# Altium PCB arduino_PCB.PcbDoc (part 1 of 2)
Units mm, origin at the board's own origin, x right, y up, seen from the top; angles counter-clockwise.
Board outline 68.58 x 53.34 mm, 2 copper layers (Top Layer, Bottom Layer); 106 components, 71 nets, 323 pads, 0 vias.
Unrouted connection lines stored in the file: 236.
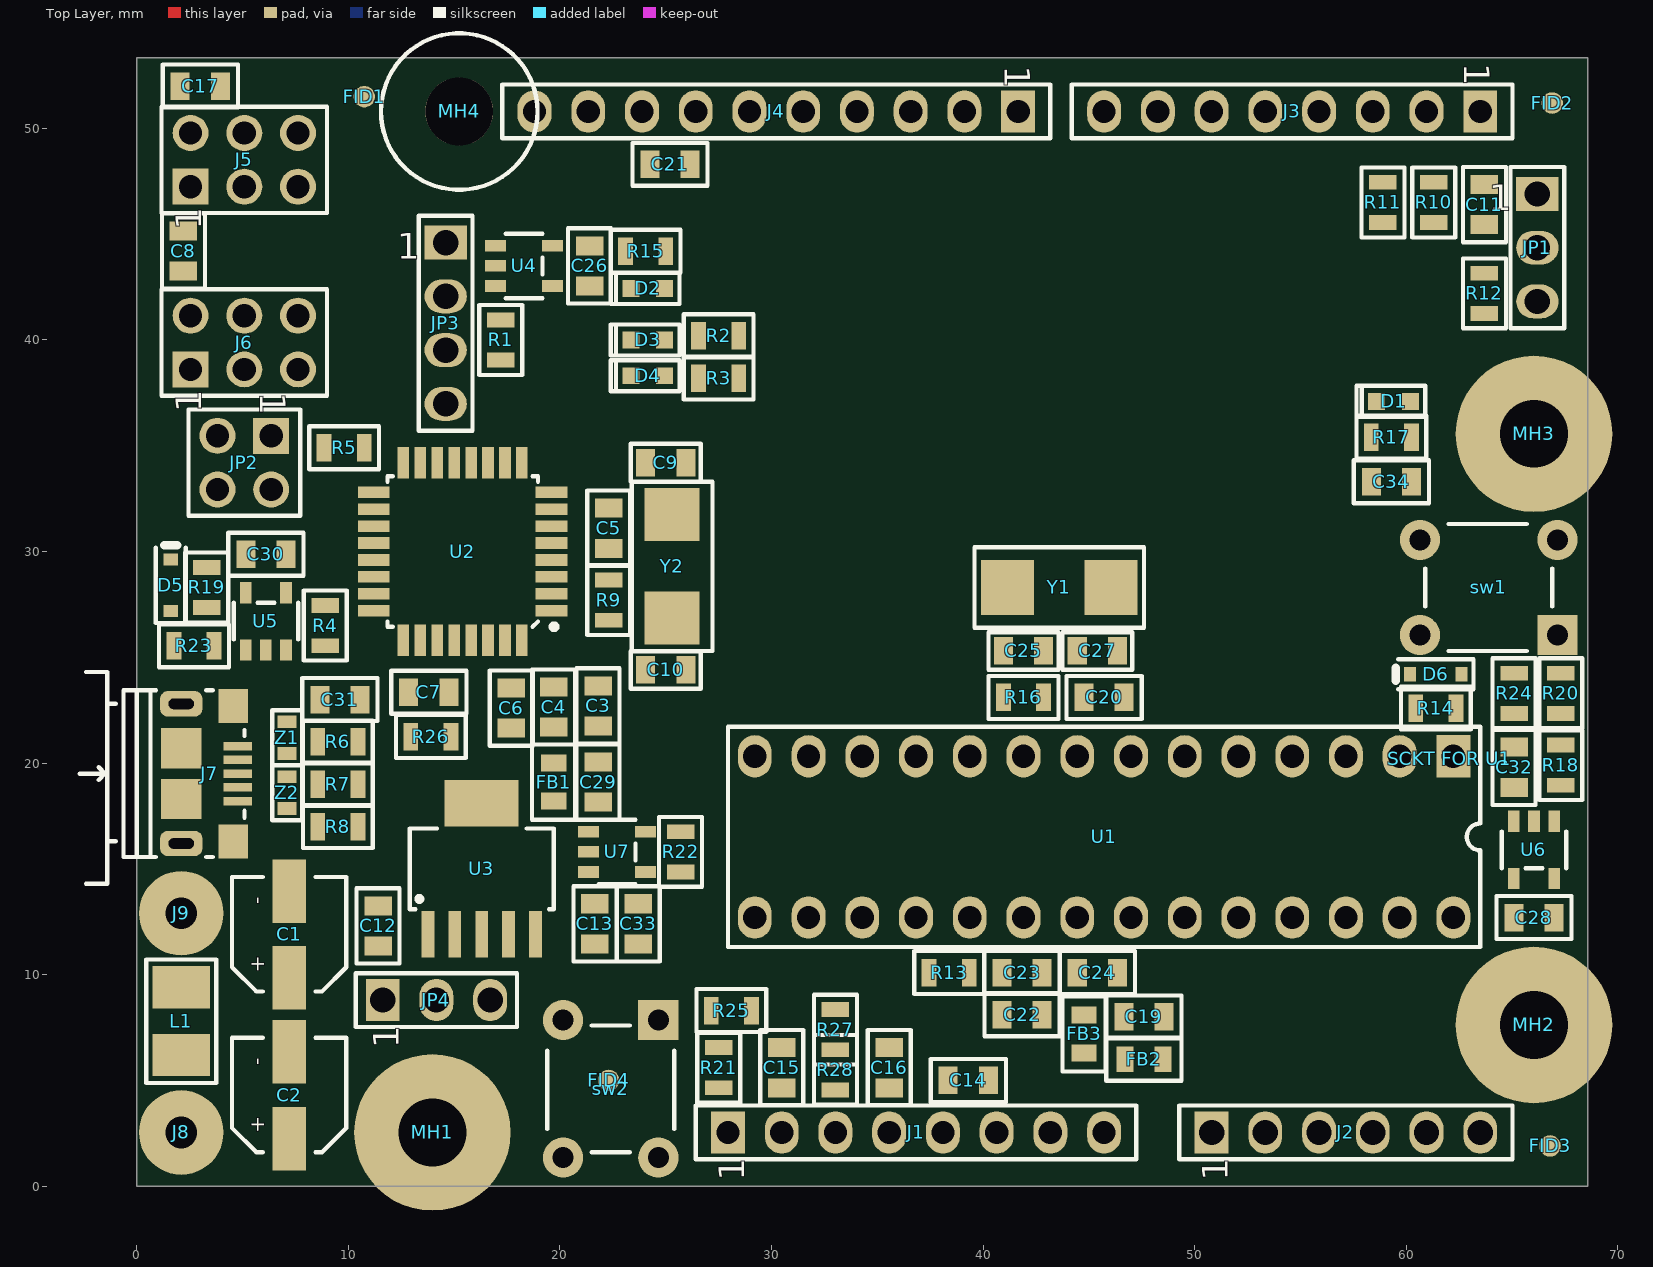
[diagram p0: Top Layer view]
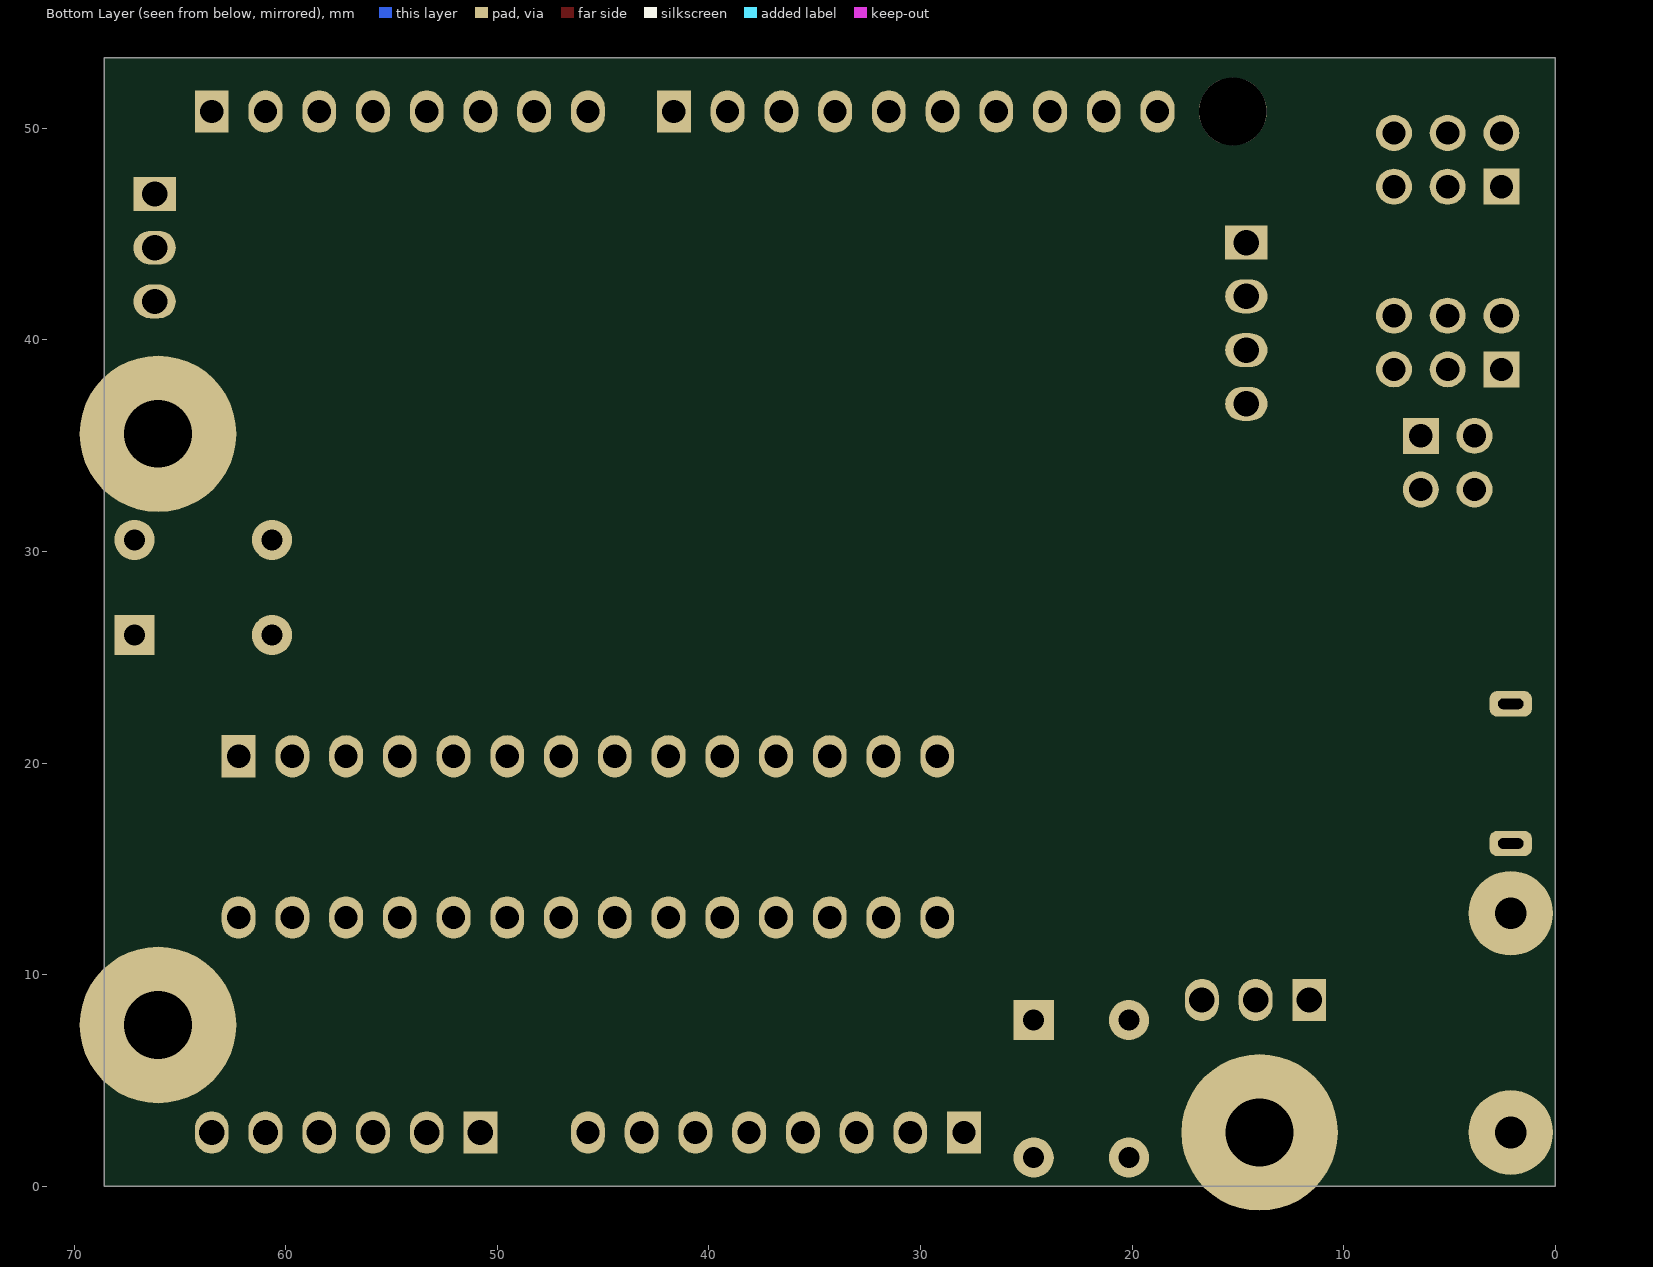
[diagram p1: Bottom Layer view, seen from below]

## Layer stack, top to bottom
Top Solder: solder mask 0.0102, Solder Resist, Dk 3.5
Top Layer: signal copper 0.0356
Dielectric 1: dielectric 0.32, FR-4, Dk 4.8
Bottom Layer: signal copper 0.0356
Bottom Solder: solder mask 0.0102, Solder Resist, Dk 3.5

## Board outline
0,0 68.58,0 68.58,53.34 0,53.34

## Design rules (kind name [scope] priority, off if disabled: settings)
Clearance [All] p1: gap=0.254 ignorepadtopadclearanceinfootprint=FALSE except(0: Arc-Hole Track-Hole SMDPad-Hole THPad-Hole Via-Hole Fill-Hole Poly-Hole Region-Hole Text-Hole)
PolygonConnect [All] p1: connectstyle=Relief reliefconductorwidth=0.254 reliefentries=4 polygonreliefangle="90 Angle" airgapwidth=0.254
RoutingVias [All] p1: holewidth=0.711 width=1.27 viastyle="Through Hole" minholewidth=0.711 minwidth=1.27 maxholewidth=0.711 maxwidth=1.27
SolderMaskExpansion [All] p1: expansion=0.102 istentingtop=FALSE
Width [All] p1: maxlimit=0.254 minlimit=0.254 preferedwidth=0.254
30 further rules are at their usual default settings.

## Components (designator, comment, footprint, x,y, rotation, side; value= is the part's Value field where it differs from the comment)
C1 "100uF/10V" C_ALU_C_SIZE 7.2,11.9 r90 top
C2 "100uF/10V" C_ALU_C_SIZE 7.2,4.3 r90 top
C3 "Cap10uF/16V" Cap10uF/16V 21.8,22.7 r270 top
C4 "Cap100nF" Cap0805 19.7,22.65 r90 top
C5 "Cap100nF" Cap0805 22.3,31.1 r270 top
C6 "Cap100nF" Cap0805 17.7,22.6 r90 top
C7 "1uF/25V" Cap0805 13.8,23.35 r180 top
C8 "Cap100nF" Cap0805 2.2,44.2 r270 top
C9 "18p" "cap0805 18pF" 25,34.2 r180 top
C10 "18p" "cap0805 18pF" 25,24.4 r180 top
C11 "Cap100nF" Cap0805 63.7,46.4 r270 top
C12 "Cap10uF/16V" Cap10uF/16V 11.4,12.3 r90 top
C13 "Cap10uF/16V" Cap10uF/16V 21.65,12.4 r270 top
C14 "Cap100nF" Cap0805 39.3,5 r180 top
C15 "Cap100nF" Cap0805 30.48,5.6 r270 top
C16 "Cap100nF" Cap0805 35.56,5.6 r270 top
C17 "Cap100nF" Cap0805 3,52 r180 top
C19 "Cap10uF/16V" Cap10uF/16V 47.6,8 r0 top
C20 "Cap100nF" Cap0805 45.72,23.1 r0 top
C21 "Cap10uF/16V" Cap10uF/16V 25.2,48.3 r180 top
C22 "Cap10uF/16V" Cap10uF/16V 41.84,8.1 r0 top
C23 "Cap100nF" Cap0805 41.84,10.1 r0 top
C24 "Cap100nF" Cap0805 45.4,10.1 r180 top
C25 "18p" "cap0805 18pF" 41.91,25.3 r0 top
C26 "Cap100nF" Cap0805 21.4,43.5 r90 top
C27 "18p" "cap0805 18pF" 45.4,25.3 r180 top
C28 "Cap100nF" Cap0805 66.04,12.7 r180 top
C29 "Cap100nF" Cap0805 21.8,19.1 r270 top
C30 "Cap100nF" Cap0805 6.1,29.869 r180 top
C31 "Cap100nF" Cap0805 9.6,23 r180 top
C32 "Cap100nF" Cap0805 65.1,19.8 r90 top
C33 "Cap100nF" Cap0805 23.7,12.4 r270 top
C34 "Cap10uF/16V" Cap10uF/16V 59.3,33.3 r180 top
D1 "Green" LED_0603 59.4,37.1 r0 top
D2 "Orange" LED_0603 24.15,42.442 r0 top
D3 "Orange" LED_0603 24.15,40 r0 top
D4 "Orange" LED_0603 24.15,38.308 r0 top
D5 "BAT54HT1G" SOD323 1.6,28.4 r270 top
D6 "BAT54HT1G" SOD323 61.4,24.2 r0 top
FB1 "MPZ2012S601AT000" MPZ2012 19.7,19.1 r90 top
FB2 "MPZ2012S601AT000" MPZ2012 47.6,6 r0 top
FB3 "MPZ2012S601AT000" MPZ2012 44.77,7.2 r90 top
FID1 "FID_1MMC" FID_40X120D 10.75,51.5 r0 top
FID2 "FID_1MMC" FID_40X120D 66.9,51.2 r90 top
FID3 "FID_1MMC" FID_40X120D 66.8,1.9 r90 top
FID4 "FID_1MMC" FID_40X120D 22.3,5 r90 top
J1 "HDR Female 1x8 2.54mm" "HDR Female 1x8 2.54mm" 27.94,2.54 r90 top locked
J2 "HDR Felale 1x6 2.54mm" "HDR Female 1x6 2.54mm" 50.8,2.54 r90 top locked
J3 "HDR Female 1x8 2.54mm" "HDR Female 1x8 2.54mm" 63.5,50.8 r270 top locked
J4 "HDR FMALE 1x10 2.54mm" "HDR Female_1x10_2.54mm" 41.656,50.8 r270 top locked
J5 "HDR 2x3" HDR_2x3_2.54mm 2.54,47.244 r90 top locked
J6 "HDR 2x3" HDR_2x3_2.54mm 2.54,38.608 r90 top locked
J7 "10118193-0001LF" 10118193 2.1,22.8 r270 top
J8 "4MMx1.5MM" PAD_WITH_HOLE_4MMx1.5MM 2.1,2.54 r0 top
J9 "4MMx1.5MM" PAD_WITH_HOLE_4MMx1.5MM 2.1,12.9 r0 top
JP1 "HDR 1x3" "HDR Female 1x3 2.54mm" 66.2,46.9 r0 top locked
JP2 "HDR 2x2" HDR_2x2_2.54mm 5.08,34.2 r270 top
JP3 "HDR1x4" "HDR Female 1x4 2.54mm" 14.6,44.6 r0 top locked
JP4 "HDR 1x3" "HDR Female 1x3 2.54mm" 11.62,8.8 r90 top locked
L1 "2u2/2A" C1210_IND 2.1,7.8 r90 top
MH1 "MH_7.4MMC3.2MMD" MH_7.4MMD_3.2MMD#1 170.053,-4.699 r0 top locked
MH2 "MH_7.4MMC3.2MMD" MH_7.4MMD_3.2MMD#2 66.04,7.62 r0 top locked
MH3 "MH_7.4MMC3.2MMD" MH_7.4MMD_3.2MMD#2 66.04,35.56 r0 top locked
MH4 "MH_7.4MMNC_3.2MMD" MH_7.4MMD_3.2MMD_NON_COPPER_NPTH 15.24,50.8 r0 top locked
R1 "100k" Resistor0805 17.2,40 r90 top
R2 "560R" Resistor0805 27.5,40.2 r0 top
R3 "560R" Resistor0805 27.5,38.2 r0 top
R4 "10K" Resistor0805 8.9,26.5 r270 top
R5 "22R" Resistor0805 9.8,34.9 r180 top
R6 "22R" Resistor0805 9.5,21 r0 top
R7 "22R" Resistor0805 9.5,19 r0 top
R8 "0R" Resistor0805 9.5,17 r0 top
R9 "R1M" Resistor0805 22.3,27.7 r270 top
R10 "1k" Resistor0805 61.3,46.5 r90 top
R11 "1k" Resistor0805 58.9,46.5 r90 top
R12 "1k" Resistor0805 63.7,42.2 r90 top
R13 "22R" Resistor0805 38.4,10.1 r180 top
R14 "10K" Resistor0805 61.4,22.6 r0 top
R15 "560R" Resistor0805 24.05,44.196 r180 top
R16 "R1M" Resistor0805 41.91,23.1 r0 top
R17 "560R" Resistor0805 59.3,35.4 r180 top
R18 "10K" Resistor0805 67.3,19.9 r90 top
R19 "10K" Resistor0805 3.3,28.3 r90 top
R20 "10K" Resistor0805 67.3,23.3 r270 top
R21 "10K" Resistor0805 27.5,5.6 r270 top
R22 "560R" Resistor0805 25.7,15.8 r90 top
R23 "22R" Resistor0805 2.7,25.55 r0 top
R24 "22R" Resistor0805 65.1,23.3 r270 top
R25 "22R" Resistor0805 28.1,8.3 r180 top
R26 "0R" Resistor0805 13.9,21.25 r0 top
R27 "0R" Resistor0805 33.02,7.4 r270 top
R28 "0R" Resistor0805 33.02,5.5 r270 top
"SCKT FOR U1" "28_DIP Socket" 28_DIP_7.62MM_SOCKET 62.065,20.193 r270 top locked
sw1 "1825910-6" 1825910-6 63.9,28.3 r270 top
sw2 "1825910-6" 1825910-6 22.4,4.6 r0 top
U1 "ATMEGA328P-PU" 28_DIP_7.62mm 62.23,20.32 r270 top locked
U2 "ATMEGA16U2-AU" TQFP32 15.4,30 r180 top locked
U3 "TL1963A-33DCQR" "DCQ (R-PDS0-G6)" 16.3,15 r90 top
U4 "HDR1x3" DBV_SOT_23_5 18.3,43.5 r0 top
U5 "HDR1x3" DBV_SOT_23_5 6.1,26.7 r90 top
U6 "HDR1x3" DBV_SOT_23_5 66.04,15.9 r270 top
U7 "HDR1x3" DBV_SOT_23_5 22.7,15.8 r0 top
Y1 "ABM7-16.000MHZ-D2Y-T" ABM_v1_1_BIG 43.6,28.3 r180 top
Y2 "ABM7-16.000MHZ-D2Y-T" ABM_v1_1_BIG 25.3,29.3 r90 top
Z1 "CG0603MLC-05E" R0603 7.1,21.2 r270 top
Z2 "CG0603MLC-05E" R0603 7.1,18.6 r90 top

## Footprints (in the part's own frame and the unit in brackets; to place one, negate y for a bottom-side part, rotate by r counter-clockwise, add the part's x,y. Pads: shape width x height; smd on the part's side, far side on the other; paste and mask are expansions set on the pad)
28_DIP_7.62mm [mm]
  rect 2x1.6 hole 1.1: 1(0,0)
  oval 2x1.6 hole 1.1: 2(0,-2.54) 3(0,-5.08) 4(0,-7.62) 5(0,-10.16) 6(0,-12.7) 7(0,-15.24) 8(0,-17.78) 9(0,-20.32) 10(0,-22.86) 11(0,-25.4) 12(0,-27.94) 13(0,-30.48) 14(0,-33.02) 15(7.62,-33.02) 16(7.62,-30.48) 17(7.62,-27.94) 18(7.62,-25.4) 19(7.62,-22.86) 20(7.62,-20.32) 21(7.62,-17.78) 22(7.62,-15.24) 23(7.62,-12.7) 24(7.62,-10.16) 25(7.62,-7.62) 26(7.62,-5.08) 27(7.62,-2.54) 28(7.62,0)
  silkscreen extent -1.4,-34.29 9.02,1.27, body extent -0.27,-33.78 7.64,0.87, height 7.94
28_DIP_7.62MM_SOCKET [mm]
  body extent -1.24,-34.23 8.86,1.27, height 4.3
1825910-6 [mm]
  rect 1.9x1.9 hole 1: 1(2.25,3.25)
  round 1.9 hole 1: 2(2.25,-3.25) 3(-2.25,3.25) 4(-2.25,-3.25)
  silkscreen extent -3,-3 3,3, body extent -3,-3.9 2.99,3.9, height 5
10118193 [mm]
  rect 0.4x1.35 smd mask+0.05: 1(2,2.675) 2(2.65,2.675) 3(3.3,2.675) 4(3.95,2.675) 5(4.6,2.675)
  rect 1.6x1.4 smd: 6(0.1,2.45) 7(6.5,2.45)
  rrect60% 1.2x2 hole 0.5 slot 1.2 at 90 deg: 8(0,0) 9(6.6,0)
  rect 1.9x1.9 smd: 10(2.1,0) 11(4.5,0)
  silkscreen extent -1.5,-4.8 8.5,2.99, body extent -0.63,-2.72 7.23,2.99, height 2.86
ABM_v1_1_BIG [mm]
  rect 2.5x2.6 smd: 1(-2.45,0) 2(2.45,0)
  silkscreen extent -4,-1.91 4,1.91, body extent -3,-1.75 3,1.75, height 1.41
C1210_IND [mm]
  rect 2x2.7 smd: 1(-1.6,0) 2(1.6,0)
  silkscreen extent -2.92,-1.65 2.92,1.65, body extent -1.6,-1.25 1.6,1.25, height 2.7
C_ALU_C_SIZE [mm]
  rect 3x1.6 smd: 1(-2.05,0) 2(2.05,0)
  silkscreen extent -2.7,-2.7 2.72,2.7, body extent -3,-2.65 3,2.65, height 5.81
Cap10uF/16V [mm]
  rect 0.9x1.3 smd: 1(-0.95,0) 2(0.95,0)
  silkscreen extent -1.78,-1.02 1.78,1.02, body extent -1,-0.6 1,0.6, height 1.46
Cap0805 [mm]
  rect 0.9x1.3 smd: 1(-0.95,0) 2(0.95,0)
  silkscreen extent -1.78,-1.02 1.78,1.02, body extent -1,-0.6 1,0.6, height 0.96
"cap0805 18pF" [mm]
  rect 0.9x1.3 smd: 1(-0.95,0) 2(0.95,0)
  silkscreen extent -1.65,-0.89 1.65,0.89, body extent -1,-0.63 1,0.62, height 0.89
DBV_SOT_23_5 [mm]
  rect 1x0.55 smd: 1(-1.35,0.95) 2(-1.35,0) 3(-1.35,-0.95) 4(1.35,-0.95) 5(1.35,0.95)
  silkscreen extent -0.86,-1.52 0.87,1.52, body extent -1.25,-1.5 1.25,1.5, height 1.11
"DCQ (R-PDS0-G6)" [mm]
  rect 2.2x0.6 smd: 1(-3.1,2.54) 2(-3.1,1.27) 3(-3.1,0) 4(-3.1,-1.27) 5(-3.1,-2.54)
  rect 2.2x3.5 smd: 6(3.1,0)
  silkscreen extent -1.91,-3.4 1.91,3.4, body extent -3.63,-3.28 3.63,3.27, height 1.79
FID_40X120D [mil]
  round 40 smd paste-1574.8 mask+40: 1(0,0)
"HDR Female 1x3 2.54mm" [mm]
  rect 2x1.6 hole 1.2: 1(0,0)
  oval 2x1.6 hole 1.2: 2(0,-2.54) 3(0,-5.08)
  silkscreen extent -1.27,-6.35 1.27,1.27, body extent -1.24,-6.35 1.24,1.27, height 8.55
"HDR Female 1x4 2.54mm" [mm]
  rect 2x1.6 hole 1.2: 1(0,0)
  oval 2x1.6 hole 1.2: 2(0,-2.54) 3(0,-5.08) 4(0,-7.62)
  silkscreen extent -1.27,-8.89 1.27,1.27, body extent -1.22,-8.89 1.27,1.27, height 8.55
"HDR Female 1x6 2.54mm" [mm]
  rect 2x1.6 hole 1.2: 1(0,0)
  oval 2x1.6 hole 1.2: 2(0,-2.54) 3(0,-5.08) 4(0,-7.62) 5(0,-10.16) 6(0,-12.7)
  silkscreen extent -1.27,-14.22 1.27,1.52, body extent -1.27,-14.22 1.27,1.52, height 8.51
"HDR Female 1x8 2.54mm" [mm]
  rect 2x1.6 hole 1.1: 1(0,0)
  oval 2x1.6 hole 1.1: 2(0,-2.54) 3(0,-5.08) 4(0,-7.62) 5(0,-10.16) 6(0,-12.7) 7(0,-15.24) 8(0,-17.78)
  silkscreen extent -1.27,-19.3 1.27,1.52, body extent -1.27,-19.3 1.27,1.52, height 8.51
"HDR Female_1x10_2.54mm" [mm]
  rect 2x1.6 hole 1.1: 1(0,0)
  oval 2x1.6 hole 1.1: 2(0,-2.54) 3(0,-5.08) 4(0,-7.62) 5(0,-10.16) 6(0,-12.7) 7(0,-15.24) 8(0,-17.78) 9(0,-20.32) 10(0,-22.86)
  silkscreen extent -1.27,-24.38 1.27,1.52, body extent -1.27,-24.38 1.27,1.52, height 8.5
HDR_2x2_2.54mm [mm]
  rect 1.7x1.7 hole 1.1: 1(-1.27,1.27)
  round 1.7 hole 1.1: 2(1.27,1.27) 3(-1.27,-1.27) 4(1.27,-1.27)
  silkscreen extent -2.51,-2.64 2.51,2.64, body extent -2.5,-2.54 2.5,2.54, height 8.61
HDR_2x3_2.54mm [mm]
  rect 1.7x1.7 hole 1.1: 1(0,0)
  round 1.7 hole 1.1: 2(2.54,0) 3(0,-2.54) 4(2.54,-2.54) 5(0,-5.08) 6(2.54,-5.08)
  silkscreen extent -1.24,-6.45 3.78,1.37, body extent -1.14,-6.35 3.68,1.27, height 8.6
LED_0603 [mm]
  rect 0.8x0.8 smd: 1(-0.8,0) 2(0.8,0)
  silkscreen extent -1.75,-0.74 1.5,0.74, body extent -0.85,-0.4 0.85,0.4, height 0.66
MH_7.4MMD_3.2MMD#1 [mm]
  round 7.4 hole 3.2: 1(-156.083,7.239)
MH_7.4MMD_3.2MMD#2 [mm]
  round 7.4 hole 3.2: 1(0,0)
MH_7.4MMD_3.2MMD_NON_COPPER_NPTH [mm]
  round 3.2 hole 3.2 unplated: 1(0,0)
  silkscreen extent -3.7,-3.7 3.7,3.7
MPZ2012 [mm]
  rect 0.8x1.2 smd: 1(-0.9,0) 2(0.9,0)
  silkscreen extent -1.78,-1.02 1.78,1.02, body extent -1,-0.63 1,0.64, height 0.87
PAD_WITH_HOLE_4MMx1.5MM [mm]
  round 4 hole 1.5: 1(0,0)
R0603 [mm]
  rect 0.6x0.9 smd: 1(-0.75,0) 2(0.75,0)
  silkscreen extent -1.3,-0.7 1.3,0.7, body extent -0.8,-0.4 0.8,0.4, height 0.85
Resistor0805 [mm]
  rect 0.7x1.3 smd: 1(-0.95,0) 2(0.95,0)
  silkscreen extent -1.65,-1.02 1.65,1.02, body extent -1,-0.6 1,0.6, height 0.71
SOD323 [mil]
  rect 22x27 smd: 1(-48,0) 2(48,0)
  silkscreen extent -75,-28 70,28, body extent -49,-25 49,25, height 39
TQFP32 [mm]
  rect 1.5x0.55 smd mask+0.06: 1(-4.2,2.8) 2(-4.2,2) 3(-4.2,1.2) 4(-4.2,0.4) 5(-4.2,-0.4) 6(-4.2,-1.2) 7(-4.2,-2) 8(-4.2,-2.8) 17(4.2,-2.8) 18(4.2,-2) 19(4.2,-1.2) 20(4.2,-0.4) 21(4.2,0.4) 22(4.2,1.2) 23(4.2,2) 24(4.2,2.8)
  rect 0.55x1.5 smd mask+0.06: 9(-2.8,-4.2) 10(-2,-4.2) 11(-1.2,-4.2) 12(-0.4,-4.2) 13(0.4,-4.2) 14(1.2,-4.2) 15(2,-4.2) 16(2.8,-4.2) 25(2.8,4.2) 26(2,4.2) 27(1.2,4.2) 28(0.4,4.2) 29(-0.4,4.2) 30(-1.2,4.2) 31(-2,4.2) 32(-2.8,4.2)
  silkscreen extent -4.45,-3.56 3.56,3.68, body extent -4.51,-4.51 4.51,4.51, height 1

## Part data
C1 C2: library part EEE-1AA101WR, "CAP ALUM 100UF 20% 10V SMD", Capacitance=100uF, Case/Package=Radial, Manufacturer=Panasonic, Max Operating Temperature=85°C, Min Operating Temperature=-40°C, Package Quantity=1, Ripple Current=50mA, Supplier Part Number 1=PCE3867CT-ND, Tolerance=20%, Voltage Rating=10V, Category="Capacitors Aluminum Electrolytic Capacitors", ComponentLink1Description=https://industrial.panasonic.com/cdbs/www-data/pdf/RDE0000/DME0000COL90.pdf?src-supplier=Mouser, ComponentLink1URL=https://industrial.panasonic.com/cdbs/www-data/pdf/RDE0000/DME0000COL90.pdf?src-supplier=Mouser, ComponentLink2Description=https://industrial.panasonic.com/cdbs/www-data/pdf/RDE0000/DME0000COL90.pdf?src-supplier=Allied+Electronics, ComponentLink2URL=https://industrial.panasonic.com/cdbs/www-data/pdf/RDE0000/DME0000COL90.pdf?src-supplier=Allied+Electronics, ComponentLink3Description=https://industrial.panasonic.com/cdbs/www-data/pdf/RDE0000/DME0000COL90.pdf?src-supplier=Avnet, ComponentLink3URL=https://industrial.panasonic.com/cdbs/www-data/pdf/RDE0000/DME0000COL90.pdf?src-supplier=Avnet, ComponentLink4Description=http://industrial.panasonic.com/www-data/pdf/ABA0000/ABA0000CE2.pdf?src-supplier=Future+Electronics, ComponentLink4URL=http://industrial.panasonic.com/www-data/pdf/ABA0000/ABA0000CE2.pdf?src-supplier=Future+Electronics, ComponentLink5Description=https://industrial.panasonic.com/cdbs/www-data/pdf/RDE0000/DME0000COL90.pdf?src-supplier=Verical, ComponentLink5URL=https://industrial.panasonic.com/cdbs/www-data/pdf/RDE0000/DME0000COL90.pdf?src-supplier=Verical, Construction=Cylindrical, Contact Plating=Tin, Diameter=5mm, Height=5.4mm, Height - Seated (Max)=0.213inch, Lead Free="Lead Free", Length=5.5mm, Life (Hours)=1000Hour, Manufacturer Part Number=EEE-1AA101WR, Mount="Surface Mount,PCB", Packaging="Tape and Reel", Pricing 1="1=0.35, 10=0.244, 50=0.1706, 100=0.1463, 500=0.10972 (USD)", Radiation Hardening=No, REACH SVHC=Unknown, Ripple Current (AC)=50mA, RoHS Compliant=Yes, Series=S, Stock 1=0, Supplier 1=Digi-Key, Termination=SMD/SMT, Voltage Rating (DC)=10V
C3 C12 C13 C19 C21 C22 C34: library part C1608X6S0G106M080AC, "TDK - C1608X6S0G106M080AC - Keramikvielschichtkondensator, SMD, 10 µF, 4 V, 0603 [Metrisch 1608], ± 20%, X6S, C Series", Capacitance=10uF, Case Code (Imperial)=0603, Case Code (Metric)=1608, Dielectric=X6S, Dielectric Material=Ceramic, Manufacturer=TDK, Max Operating Temperature=105°C, Min Operating Temperature=-55°C, Package Quantity=1, Supplier Part Number 1=445-7455-6-ND, Tolerance=20%, Voltage Rating=4V, Case/Package=0603, Category="Capacitors Ceramic Capacitors", ComponentLink1Description=https://product.tdk.com/info/en/catalog/spec/mlccspec_commercial_general_midvoltage_en.pdf?src-supplier=Digi-Key, ComponentLink1URL=https://product.tdk.com/info/en/catalog/spec/mlccspec_commercial_general_midvoltage_en.pdf?src-supplier=Digi-Key, ComponentLink2Description=https://product.tdk.com/info/en/catalog/datasheets/mlcc_commercial_general_en.pdf?ref_disty=digikey&src-supplier=Digi-Key, ComponentLink2URL=https://product.tdk.com/info/en/catalog/datasheets/mlcc_commercial_general_en.pdf?ref_disty=digikey&src-supplier=Digi-Key, ComponentLink3Description=http://www.mouser.com/ds/2/400/lcc_commercial_general_en-837201.pdf?src-supplier=Mouser, ComponentLink3URL=http://www.mouser.com/ds/2/400/lcc_commercial_general_en-837201.pdf?src-supplier=Mouser, Construction=Flat, Depth=0.8mm, Height=0.8mm, Lead Free="Lead Free", Length=1.6mm, Manufacturer Part Number=C1608X6S0G106M080AC, Mount="Surface Mount", Number of Pins=2, Packaging="Tape and Reel", Pricing 1="1=0.36, 10=0.248, 50=0.1656, 100=0.1408, 500=0.09936, 1000=0.08694 (USD)", REACH SVHC="No SVHC", Resistor Type=Ceramic, RoHS Compliant=Yes, Series=C, Stock 1=32195, Supplier 1=Digi-Key, Termination=SMD/SMT, Thickness=0.035inch, Voltage Rating (DC)=4V, Weight=7.1E-05oz, Width=0.031inch
C4 C5 C6 C8 C11 C14 C15 C16 C17 C20 C23 C24 C26 C28 C29 C30 C31 C32 C33: library part CGA4J2X7R1H104K125AM, "CAP CER 0.1UF 50V X7R 0805", Capacitance=100nF, Case Code (Imperial)=0805, Case Code (Metric)=2012, Dielectric=X7R, Manufacturer=TDK, Max Operating Temperature=125°C, Min Operating Temperature=-55°C, Package Quantity=1, Ratings=AEC-Q200, Resistor Type=Ceramic, Supplier Part Number 1=445-6958-6-ND, Tolerance=10%, Voltage Rating=50V, Case/Package=0805, Category="Capacitors Ceramic Capacitors", ComponentLink1Description=https://product.tdk.com/info/en/documents/chara_sheet/CGA4J2X7R1H104K125AM.pdf?src-supplier=Digi-Key, ComponentLink1URL=https://product.tdk.com/info/en/documents/chara_sheet/CGA4J2X7R1H104K125AM.pdf?src-supplier=Digi-Key, ComponentLink2Description=https://product.tdk.com/info/en/catalog/datasheets/mlcc_automotive_openmode_en.pdf?src-supplier=Digi-Key, ComponentLink2URL=https://product.tdk.com/info/en/catalog/datasheets/mlcc_automotive_openmode_en.pdf?src-supplier=Digi-Key, ComponentLink3Description=http://components.arrow.com/part/dataview/57437351S460182N1165?src-supplier=Arrow+Electronics, ComponentLink3URL=http://components.arrow.com/part/dataview/57437351S460182N1165?src-supplier=Arrow+Electronics, ComponentLink4Description=http://components.arrow.com/part/dataview/0323_06888403?src-supplier=Arrow+Europe, ComponentLink4URL=http://components.arrow.com/part/dataview/0323_06888403?src-supplier=Arrow+Europe, Depth=1.25mm, Features="Soft Termination", Height=1.25mm, Length=0.079inch, Manufacturer Part Number=CGA4J2X7R1H104K125AM, Mount="Surface Mount", Packaging="Tape and Reel", Pricing 1="1=0.2, 10=0.142, 50=0.0808, 100=0.067, 500=0.04696, 1000=0.03888 (USD)", RoHS Compliant=Yes, Series=CGA, Stock 1=7940, Supplier 1=Digi-Key, Termination=SMD/SMT, Thickness=0.057inch, Voltage Rating (DC)=50V, Weight=0.000194oz, Width=0.049inch
C7: library part C2012X5R1E105K125AA, "TDK - C2012X5R1E105K125AA - SMD Multilayer Ceramic Capacitor, 1 µF, 25 V, 0805 [2012 Metric], ± 10%, X5R, C Series", Capacitance=1uF, Case Code (Imperial)=0805, Case Code (Metric)=2012, Dielectric=X5R, Dielectric Material=Ceramic, Manufacturer=TDK, Max Operating Temperature=85°C, Min Operating Temperature=-55°C, Package Quantity=2000, Supplier Part Number 1=445-1419-6-ND, Tolerance=10%, Voltage=25V, Case/Package=0805, Category="Capacitors Ceramic Capacitors", ComponentLink1Description=http://www.farnell.com/datasheets/1744655.pdf?src-supplier=Element14, ComponentLink1URL=http://www.farnell.com/datasheets/1744655.pdf?src-supplier=Element14, ComponentLink2Description=http://uk.rs-online.com/webdocs/1532/0900766b81532cd0.pdf?src-supplier=RSComponents, ComponentLink2URL=http://uk.rs-online.com/webdocs/1532/0900766b81532cd0.pdf?src-supplier=RSComponents, ComponentLink3Description=http://www.tdk.co.jp/tefe02/e412_c.pdf?src-supplier=Future+Electronics, ComponentLink3URL=http://www.tdk.co.jp/tefe02/e412_c.pdf?src-supplier=Future+Electronics, ComponentLink4Description=https://product.tdk.com/info/en/catalog/spec/mlccspec_commercial_general_midvoltage_en.pdf?src-supplier=Verical, ComponentLink4URL=https://product.tdk.com/info/en/catalog/spec/mlccspec_commercial_general_midvoltage_en.pdf?src-supplier=Verical, Construction=Flat, Depth=1.25mm, Height=1.25mm, Lead Free="Lead Free", Length=2mm, Manufacturer Part Number=C2012X5R1E105K125AA, Mount="Surface Mount", Number of Pins=2, Packaging="Tape and Reel", Pricing 1="1=0.24, 10=0.166, 50=0.0994, 100=0.0839, 500=0.0574, 1000=0.05078 (USD)", Radiation Hardening=No, REACH SVHC="No SVHC", Resistor Type=Ceramic, RoHS Compliant=Yes, Series=C, Stock 1=96448, Supplier 1=Digi-Key, Termination=SMD/SMT, Thickness=0.057inch, Voltage Rating=25V, Voltage Rating (DC)=25V, Weight=0.000194oz, Width=0.049inch
C9 C10 C25 C27: library part C0805C180C5GAC7800, "CAP CER 18PF 50V NP0 0805", Capacitance=18pF, Case/Package=0805, Dielectric Material=Ceramic, Manufacturer=KEMET, Supplier Part Number 1=399-14562-6-ND, Voltage Rating (DC)=50V, Category="Capacitors Ceramic Capacitors", ComponentLink1Description=https://api.kemet.com/component-edge/download/datasheet/C0805C180C5GACTU.pdf?src-supplier=Digi-Key, ComponentLink1URL=https://api.kemet.com/component-edge/download/datasheet/C0805C180C5GACTU.pdf?src-supplier=Digi-Key, Lead Free="Lead Free", Manufacturer Part Number=C0805C180C5GAC7800, Pricing 1="1=0.82, 10=0.604, 50=0.483, 100=0.414, 500=0.32776, 1000=0.276 (USD)", RoHS Compliant=Yes, Stock 1=2472, Supplier 1=Digi-Key
D1: library part LGL29K-G2J1-24-Z, "LED Uni-Color Green 572nm 2-Pin Chip 0603(1608Metric) T/R", Case Code (Imperial)=0603, Case Code (Metric)=1608, Forward Current=20mA, Forward Voltage=2.2V, Lens Color=White, Manufacturer="Osram Opto", Max Operating Temperature=100°C, Min Operating Temperature=-40°C, Package Quantity=5000, Reverse Voltage=12V, Supplier Part Number 1=475-2709-1-ND, Test Current=2mA, Case/Package=0603, Category="Optoelectronics LED Indication - Discrete", Color=Green, ComponentLink1Description=https://dammedia.osram.info/media/resource/hires/osram-dam-2493945/LG%20L29K.pdf?src-supplier=Digi-Key, ComponentLink1URL=https://dammedia.osram.info/media/resource/hires/osram-dam-2493945/LG%20L29K.pdf?src-supplier=Digi-Key, ComponentLink2Description=http://www.mouser.com/ds/2/311/LG%20L29K%20-%20SMARTLED%200603-335234.pdf?src-supplier=Mouser, ComponentLink2URL=http://www.mouser.com/ds/2/311/LG%20L29K%20-%20SMARTLED%200603-335234.pdf?src-supplier=Mouser, ComponentLink3Description=https://www.verical.com/server-webapp/html/getDatasheet?partID=571127&src-supplier=Verical, ComponentLink3URL=https://www.verical.com/server-webapp/html/getDatasheet?partID=571127&src-supplier=Verical, Depth=0.8mm, Dominant Wavelength=570nm, Height=0.65mm, Illumination Color=Green, Length=1.3mm, Lens Size=0.8mm, Lens Style=Flat,Diffused,Colorless,Rectangular, Lens Transparency=Diffused, Luminous Flux=0.012lm, Luminous Intensity=5.6mcd, Manufacturer Part Number=LGL29K-G2J1-24-Z, Mount="Surface Mount", Number of Elements=1, Number of LEDs=1, Number of Pins=2, Packaging="Tape and Reel", Pricing 1="1=0.47, 10=0.31, 100=0.2071, 500=0.14322, 1000=0.11936, 2000=0.10742 (USD)", Radiation Hardening=No, RoHS Compliant=Yes, Series=SmartLED, Stock 1=0, Supplier 1=Digi-Key, Viewing Angle=160°, Width=0.8mm
D2 D3 D4: library part LOL29K-H2K1-24-Z, "OSRAM - LO L29K-H2K1-24-Z - SMARTLED 0603 ORANGE 55AC2374", Case Code (Imperial)=0603, Case Code (Metric)=1608, Forward Current=20mA, Forward Voltage=2.2V, Lens Color=White, Manufacturer="Osram Opto", Max Operating Temperature=100°C, Min Operating Temperature=-40°C, Package Quantity=5000, Reverse Voltage=12V, Supplier Part Number 1=475-2740-1-ND, Test Current=2mA, Case/Package=0603, Category="Optoelectronics LED Indication - Discrete", Color=Orange, ComponentLink1Description=https://dammedia.osram.info/media/resource/hires/osram-dam-2493882/LO%20L29K.pdf?src-supplier=Digi-Key, ComponentLink1URL=https://dammedia.osram.info/media/resource/hires/osram-dam-2493882/LO%20L29K.pdf?src-supplier=Digi-Key, ComponentLink2Description=https://www.verical.com/server-webapp/html/getDatasheet?partID=693885&src-supplier=Verical, ComponentLink2URL=https://www.verical.com/server-webapp/html/getDatasheet?partID=693885&src-supplier=Verical, Depth=0.8mm, Dominant Wavelength=606nm, Height=0.65mm, Illumination Color=Orange, Length=1.3mm, Lens Size=0.8mm, Lens Style=Flat,Diffused,Colorless,Rectangular, Lens Transparency=Diffused, Luminous Flux=0.025lm, Luminous Intensity=9mcd, Manufacturer Part Number=LOL29K-H2K1-24-Z, Mount="Surface Mount", Number of Elements=1, Number of LEDs=1, Number of Pins=2, Packaging="Tape and Reel", Pricing 1="1=0.46, 10=0.3, 100=0.2001, 500=0.1384, 1000=0.11533, 2000=0.1038 (USD)", Radiation Hardening=No, RoHS Compliant=Yes, Series=SmartLED, Stock 1=5754, Supplier 1=Digi-Key, Viewing Angle=160°, Width=0.8mm
D5 D6: "Small Signal Schottky Diode, Single, 30 V, 200 Ma, 800 Mv, 600 Ma, 150 C", Average Rectified Current=200mA, Capacitance=10pF, Forward Voltage=800mV, Manufacturer="ON Semiconductor / Fairchild", Max Forward Surge Current (Ifsm)=600mA, Max Operating Temperature=150°C, Max Repetitive Reverse Voltage (Vrrm)=30V, Max Reverse Current=2uA, Min Operating Temperature=-55°C, Package Quantity=3000, Power Dissipation=200mW, Supplier Part Number 1=BAT54HT1GOSCT-ND, Category="Discrete Semiconductor Products Diodes - Rectifiers - Single", ComponentLink1Description=http://www.fairchildsemi.com/datasheets/BA/BAT54HT1G.pdf?src-supplier=Digi-Key, ComponentLink1URL=http://www.fairchildsemi.com/datasheets/BA/BAT54HT1G.pdf?src-supplier=Digi-Key, ComponentLink2Description=http://www.jameco.com/Jameco/Products/ProdDS/806549.pdf?src-supplier=Jameco, ComponentLink2URL=http://www.jameco.com/Jameco/Products/ProdDS/806549.pdf?src-supplier=Jameco, ComponentLink3Description=http://uk.rs-online.com/webdocs/11a6/0900766b811a63a9.pdf?src-supplier=RSComponents, ComponentLink3URL=http://uk.rs-online.com/webdocs/11a6/0900766b811a63a9.pdf?src-supplier=RSComponents, ComponentLink4Description=http://www.fairchildsemi.com/ds/BA/BAT54HT1G.pdf?src-supplier=Future+Electronics, ComponentLink4URL=http://www.fairchildsemi.com/ds/BA/BAT54HT1G.pdf?src-supplier=Future+Electronics, ComponentLink5Description=https://media.digikey.com/pdf/Data%20Sheets/Fairchild%20PDFs/BAT54HT1G_Rev_1.2.pdf?src-supplier=Avnet, ComponentLink5URL=https://media.digikey.com/pdf/Data%20Sheets/Fairchild%20PDFs/BAT54HT1G_Rev_1.2.pdf?src-supplier=Avnet, ComponentLink6Description=http://www.onsemi.com/pub/Collateral/BAT54HT1-D.PDF?src-supplier=Avnet, ComponentLink6URL=http://www.onsemi.com/pub/Collateral/BAT54HT1-D.PDF?src-supplier=Avnet, ComponentLink7Description=https://media.digikey.com/pdf/Data%20Sheets/Fairchild%20PDFs/BAT54HT1G_Rev_1.2.pdf?src-supplier=Mouser, ComponentLink7URL=https://media.digikey.com/pdf/Data%20Sheets/Fairchild%20PDFs/BAT54HT1G_Rev_1.2.pdf?src-supplier=Mouser, ComponentLink8Description=http://www.mouser.com/ds/2/149/BAT54HT1G-104602.pdf?src-supplier=Mouser, ComponentLink8URL=http://www.mouser.com/ds/2/149/BAT54HT1G-104602.pdf?src-supplier=Mouser, ComponentLink9Description=http://www.farnell.com/datasheets/2251626.pdf?src-supplier=Newark, ComponentLink9URL=http://www.farnell.com/datasheets/2251626.pdf?src-supplier=Newark, ComponentLink10Description=http://www.farnell.com/datasheets/2251626.pdf?src-supplier=Element14, ComponentLink10URL=http://www.farnell.com/datasheets/2251626.pdf?src-supplier=Element14, ComponentLink11Description=http://www.onsemi.com/pub/Collateral/BAT54HT1-D.PDF?src-supplier=Digi-Key, ComponentLink11URL=http://www.onsemi.com/pub/Collateral/BAT54HT1-D.PDF?src-supplier=Digi-Key, ComponentLink12Description=http://www.farnell.com/datasheets/1727620.pdf?src-supplier=Element14, ComponentLink12URL=http://www.farnell.com/datasheets/1727620.pdf?src-supplier=Element14, ComponentLink13Description=http://www.produktinfo.conrad.com/datenblaetter/1200000-1299999/001262925-da-01-en-DIODE_SCHOTTKY_30V_BAT54HT1G_SOD_323_FSC.pdf?src-supplier=Conrad, ComponentLink13URL=http://www.produktinfo.conrad.com/datenblaetter/1200000-1299999/001262925-da-01-en-DIODE_SCHOTTKY_30V_BAT54HT1G_SOD_323_FSC.pdf?src-supplier=Conrad, Contact Plating=Tin,Matte, Current Rating=200mA, Element Configuration=Single, Forward Current=200mA, Height=1mm, Lead Free="Lead Free", Length=1.8mm, Manufacturer Part Number=BAT54HT1G, Max Reverse Leakage Current=2uA, Max Reverse Voltage (DC)=30V, Max Surge Current=600mA, Mount="Surface Mount", Number of Pins=2, Output Current=200mA, Packaging="Tape and Reel", Peak Non-Repetitive Surge Current=600mA, Polarity=Standard, Pricing 1="1=0.24, 10=0.199, 100=0.1057, 500=0.06956, 1000=0.0473 (USD)", Radiation Hardening=No, REACH SVHC="No SVHC", Recovery Time=5ns, Reverse Recovery Time=5ns, Reverse Voltage=30V, RoHS Compliant=Yes, Stock 1=0, Supplier 1=Digi-Key, Voltage Rating (DC)=30V, Width=1.35mm
FB1 FB2 FB3: "Ferrite Beads Multi-Layer Power 600Ohm 25% 100MHz 2A 100mOhm DCR 0805 T/R", Case Code (Imperial)=0805, Case Code (Metric)=2012, Current Rating=2A, DC Resistance (DCR)=100mR, Manufacturer=TDK, Package Quantity=1, Supplier Part Number 1=445-2206-1-ND, Case/Package=0805, Category="Filters Ferrite Beads and Chips", ComponentLink1Description=https://product.tdk.com/info/en/catalog/datasheets/beads_commercial_power_mpz2012_en.pdf?src-supplier=Digi-Key, ComponentLink1URL=https://product.tdk.com/info/en/catalog/datasheets/beads_commercial_power_mpz2012_en.pdf?src-supplier=Digi-Key, ComponentLink2Description=https://media.digikey.com/pdf/Data%20Sheets/TDK%20PDFs/MPZ_Series_Br.pdf?src-supplier=Digi-Key, ComponentLink2URL=https://media.digikey.com/pdf/Data%20Sheets/TDK%20PDFs/MPZ_Series_Br.pdf?src-supplier=Digi-Key, Height=0.041inch, Impedance=600R, Lead Free="Lead Free", Length=0.079inch, Manufacturer Part Number=MPZ2012S601AT000, Max DC Current=2A, Mount="Surface Mount", Packaging="Tape and Reel", Pricing 1="1=0.12, 10=0.101, 25=0.0904, 50=0.0664, 100=0.0574, 250=0.04528, 500=0.03824, 1000=0.03221 (USD)", REACH SVHC="No SVHC", RoHS Compliant=Yes, Series=MPZ, Stock 1=0, Supplier 1=Digi-Key, Width=0.049inch
FID1 FID2 FID3 FID4: "Fiducial 40 mil Diameter,120mil Mask"
J1 J3: library part PPTC081LFBN-RC, "CONN HDR 8POS 0.1 TIN PCB", Color=Black, Manufacturer=Sullins, Package Quantity=1000, Supplier Part Number 1=S7006-ND, Category="Connectors, Interconnects Rectangular Connectors - Headers, Receptacles, Female Sockets", Connector Type=Header, Contact Material=Bronze, Contact Plating=Tin, Contact Type="Female Socket", Height=8.5mm, Housing Material=Plastic, Lead Free="Lead Free", Length=20.8mm, Manufacturer Part Number=PPTC081LFBN-RC, Mount="Through Hole", Number of Positions=8, Number of Rows=1, Packaging=Bulk, Pitch=0.1inch, Pricing 1="1=0.65, 10=0.565, 400=0.42525, 800=0.3645, 1200=0.33413, 5200=0.29363, 10000=0.2925 (USD)", RoHS Compliant=Yes, Stock 1=153855, Supplier 1=Digi-Key, Termination=Solder, Width=2.5mm
J2: library part PPTC061LFBN-RC, "Female, 6 C, Straight, .100\"CC; 3.20mm Tail, No Mt. 100u\" Tin; PBT, Phos Bronze, 105 C", Color=Black, Manufacturer=Sullins, Package Quantity=1000, Supplier Part Number 1=S7004-ND, Category="Connectors, Interconnects Rectangular Connectors - Headers, Receptacles, Female Sockets", Connector Type=Header, Contact Material=Bronze, Contact Plating=Tin, Contact Type="Female Socket", Height=8.5mm, Housing Material=Plastic, Lead Free="Lead Free", Length=15.7mm, Manufacturer Part Number=PPTC061LFBN-RC, Mount="Through Hole", Number of Positions=6, Number of Rows=1, Packaging=Bulk, Pitch=0.1inch, Pricing 1="1=0.52, 10=0.449, 80=0.3705, 440=0.3222, 1000=0.26582, 5000=0.2336, 10000=0.2327 (USD)", RoHS Compliant=Yes, Stock 1=128145, Supplier 1=Digi-Key, Termination=Solder, Width=2.5mm
J4: library part PPTC101LFBN-RC, "CONN HDR 10POS 0.1 TIN PCB", Color=Black, Manufacturer=Sullins, Package Quantity=1000, Supplier Part Number 1=S7008-ND, Category="Connectors, Interconnects Rectangular Connectors - Headers, Receptacles, Female Sockets", Connector Type=Header, Contact Material=Bronze, Contact Plating=Tin, Contact Type="Female Socket", Height=8.5mm, Housing Material=Plastic, Lead Free="Lead Free", Length=25.9mm, Manufacturer Part Number=PPTC101LFBN-RC, Mount="Through Hole", Number of Positions=10, Number of Rows=1, Packaging=Bulk, Pitch=0.1inch, Pricing 1="1=0.65, 10=0.551, 320=0.45, 640=0.405, 960=0.36, 5120=0.325 (USD)", RoHS Compliant=Yes, Stock 1=7943, Supplier 1=Digi-Key, Termination=Solder, Width=2.5mm
J5 J6: library part 67997-206HLF, "Conn Unshrouded Header HDR 6 POS 2.54mm Solder ST Top Entry Thru-Hole BergStik® Bulk", Manufacturer="Amphenol ICC / FCI", Supplier Part Number 1=609-3234-ND, Category="Connectors, Interconnects,Rectangular Connectors - Headers, Male Pins", Manufacturer Part Number=67997-206HLF, Pricing 1="1=0.42, 10=0.361, 100=0.2804, 500=0.24034, 1000=0.20029, 5000=0.17168, 10000=0.16023 (USD)", Stock 1=20290, Supplier 1=Digi-Key
J7: "CONN USB MICRO B RECPT SMT R/A", Manufacturer="Amphenol ICC / FCI", Supplier Part Number 1=609-4616-6-ND, Category="Connectors, Interconnects USB, DVI, HDMI Connectors", Manufacturer Part Number=10118193-0001LF, Pricing 1="1=0.45, 10=0.397, 25=0.3624, 50=0.3412, 100=0.327, 250=0.29856, 500=0.28434 (USD)", Stock 1=209625, Supplier 1=Digi-Key
J8 J9: library part PAD_WITH_HOLE_4MMx1.5MM, "pad_with_hole_4mmx10.5mm"
JP1 JP4: library part 68001-203HLF, "Conn Unshrouded Header HDR 3 POS 2.54mm Solder ST Top Entry Thru-Hole BergStik® Bulk", Manufacturer="Amphenol ICC / FCI", Supplier Part Number 1=609-3470-ND, Category="Connectors, Interconnects,Rectangular Connectors - Headers, Male Pins", Manufacturer Part Number=68001-203HLF, Pricing 1="1=0.24, 10=0.205, 100=0.1576, 500=0.13332, 1000=0.10908, 5000=0.09696, 10000=0.08787 (USD)", Stock 1=11655, Supplier 1=Digi-Key
JP2: library part 67996-204HLF, "CONN HEADER 4POS .100 STR 15AU", Color=Black, Current Rating=3A, Insulation Resistance=5GR, Manufacturer="Amphenol ICC / FCI", Max Operating Temperature=125°C, Max Voltage Rating (AC)=1.5kV, Min Operating Temperature=-65°C, Package Quantity=100, Supplier Part Number 1=609-3209-ND, Category="Connectors, Interconnects,Rectangular Connectors - Headers, Male Pins", ComponentLink1Description=https://cdn.amphenol-icc.com/media/wysiwyg/files/drawing/67996.pdf?src-supplier=Digi-Key, ComponentLink1URL=https://cdn.amphenol-icc.com/media/wysiwyg/files/drawing/67996.pdf?src-supplier=Digi-Key, ComponentLink2Description=http://portal.fciconnect.com/Comergent/adirect/fci?cmd=catCustomerDrawing&productName=67996-204HLF&src-supplier=Mouser, ComponentLink2URL=http://portal.fciconnect.com/Comergent/adirect/fci?cmd=catCustomerDrawing&productName=67996-204HLF&src-supplier=Mouser, ComponentLink3Description=http://portal.fciconnect.com/Comergent/fci/drawing/67996.pdf?src-supplier=Avnet, ComponentLink3URL=http://portal.fciconnect.com/Comergent/fci/drawing/67996.pdf?src-supplier=Avnet, ComponentLink4Description=https://www.alliedelec.com/m/d/53bb23c358fc256e41050113d473e6c3.pdf?src-supplier=Allied+Electronics, ComponentLink4URL=https://www.alliedelec.com/m/d/53bb23c358fc256e41050113d473e6c3.pdf?src-supplier=Allied+Electronics, Connector Type="Male Pin", Contact Gender=Male, Contact Material=Bronze, Contact Mating Length=0.23inch, Contact Plating=Gold,GXT, Contact Post Length=2.41mm, Contact Type="Male Pin", Depth=4.83mm, Gender=Male, Housing Color=Black, Housing Material=Thermoplastic, Length=5.08mm, Manufacturer Part Number=67996-204HLF, Mount="Through Hole", Number of Contacts=4, Number of Positions=4, Number of Rows=2, Orientation=Straight, Packaging=Bulk, Pitch=2.54mm, Pricing 1="1=0.37, 10=0.318, 100=0.2475, 500=0.21212, 1000=0.17677, 5000=0.15152, 10000=0.14141 (USD)", Radiation Hardening=No, RoHS Compliant=Yes, Row Spacing=0.1inch, Series="BERGSTIK® II, MezzSelect™, Basics+", Stock 1=2285, Supplier 1=Digi-Key, Termination=Solder, Voltage Rating=1.5kV
JP3: library part 68002-404HLF, "Board Connector, 4 Contact(s), 1 Row(s), Male, Straight, Solder Terminal", Manufacturer="Amphenol ICC", Supplier Part Number 1=609-3305-ND, Category="Connectors, Interconnects,Rectangular Connectors - Headers, Male Pins", Manufacturer Part Number=68002-404HLF, Pricing 1="1=0.25, 10=0.209, 100=0.1611, 500=0.13628, 1000=0.11151, 5000=0.09912, 10000=0.08983 (USD)", Stock 1=1260, Supplier 1=Digi-Key
L1: library part L1210R2R2MDWIT, "KEMET         L1210R2R2MDWIT             Product Range:L-DWI Series", Case Code (Imperial)=1210, Case Code (Metric)=3225, Current Rating=2A, DC Current=1.13A, DC Resistance (DCR)=80mR, Inductance=2.2uH, Inductance Tolerance=20%, Manufacturer=KEMET, Max Operating Temperature=105°C, Min Operating Temperature=-40°C, Package Quantity=1000, Resistor Type=Wirewound,Ceramic, Self Resonant Frequency=190MHz, Supplier Part Number 1=399-9598-6-ND, Test Frequency=100kHz, Case/Package=1210, Category="Inductors, Coils, Chokes Fixed Inductors", ComponentLink1Description=http://www.farnell.com/datasheets/27262.pdf?src-supplier=Element14, ComponentLink1URL=http://www.farnell.com/datasheets/27262.pdf?src-supplier=Element14, ComponentLink2Description=https://api.kemet.com/component-edge/download/datasheet/L1210R2R2MDWIT.pdf?src-supplier=Digi-Key, ComponentLink2URL=https://api.kemet.com/component-edge/download/datasheet/L1210R2R2MDWIT.pdf?src-supplier=Digi-Key, ComponentLink3Description=https://content.kemet.com/datasheets/F3115.pdf?src-supplier=Mouser, ComponentLink3URL=https://content.kemet.com/datasheets/F3115.pdf?src-supplier=Mouser, ComponentLink4Description=http://www.kemet.com/Lists/ProductCatalog/Attachments/57/F3115.pdf?src-supplier=Avnet, ComponentLink4URL=http://www.kemet.com/Lists/ProductCatalog/Attachments/57/F3115.pdf?src-supplier=Avnet, ComponentLink5Description=https://content.kemet.com/datasheets/F3115.pdf?src-supplier=Avnet+Europe, ComponentLink5URL=https://content.kemet.com/datasheets/F3115.pdf?src-supplier=Avnet+Europe, Core Material=Ferrite, Depth=2.7mm, Height=2.5mm, Height - Seated (Max)=0.106inch, Length=0.126inch, Manufacturer Part Number=L1210R2R2MDWIT, Max DC Current=2A, Military Standard=Not, Mount="Surface Mount", Packaging="Tape and Reel", Pricing 1="1=0.5, 10=0.437, 25=0.406, 50=0.3436, 100=0.3124, 250=0.29364, 500=0.2624 (USD)", Radiation Hardening=No, REACH SVHC="No SVHC", RoHS Compliant=Yes, Series=L-DWI, Shielding=Unshielded, Stock 1=6735, Supplier 1=Digi-Key, Termination=SMD/SMT, Tolerance=20%, Width=0.098inch
MH1 MH2 MH3: "Mounting Hole 7.4mm Diameter,3.2mm Drill"
MH4: "Hole 7.4mm Diameter (Non Copper), 3.2mm Drill NPHT"
R1: library part RE0805FRE07100KL, "Fixed Resistor, Metal Glaze/thick Film, 0.125W, 100000ohm, 150V, 1% +/-Tol, 50ppm/°C SMD 0805", Case/Package=0805, Manufacturer=Yageo, Max Operating Temperature=155°C, Max Power Dissipation=125mW, Min Operating Temperature=-55°C, Resistance=100kR, Resistor Type="Thick Film", Supplier Part Number 1=13-RE0805FRE07100KLDKR-ND, Temperature Coefficient=50ppm/°C, Tolerance=1%, Category="Resistors Chip Resistor - Surface Mount", ComponentLink1Description=http://www.yageo.com/NewPortal/yageodocoutput?fileName=/pdf/R-Chip/PYu-RE_105_RoHS_L_4.pdf&src-supplier=Digi-Key, ComponentLink1URL=http://www.yageo.com/NewPortal/yageodocoutput?fileName=/pdf/R-Chip/PYu-RE_105_RoHS_L_4.pdf&src-supplier=Digi-Key, ComponentLink2Description=https://datasheet.octopart.com/RE0805FRE07100KL-Yageo-datasheet-24910706.pdf?src-supplier=Future+Electronics, ComponentLink2URL=https://datasheet.octopart.com/RE0805FRE07100KL-Yageo-datasheet-24910706.pdf?src-supplier=Future+Electronics, ComponentLink3Description=https://datasheet.octopart.com/RE0805FRE07100KL-Yageo-datasheet-61253463.pdf?src-supplier=Future+Electronics, ComponentLink3URL=https://datasheet.octopart.com/RE0805FRE07100KL-Yageo-datasheet-61253463.pdf?src-supplier=Future+Electronics, ComponentLink4Description=https://datasheet.octopart.com/RE0805FRE07100KL-Yageo-datasheet-62044470.pdf?src-supplier=Future+Electronics, ComponentLink4URL=https://datasheet.octopart.com/RE0805FRE07100KL-Yageo-datasheet-62044470.pdf?src-supplier=Future+Electronics, ComponentLink5Description=https://datasheet.octopart.com/RE0805FRE07100KL-Yageo-datasheet-68298056.pdf?src-supplier=Future+Electronics, ComponentLink5URL=https://datasheet.octopart.com/RE0805FRE07100KL-Yageo-datasheet-68298056.pdf?src-supplier=Future+Electronics, ComponentLink6Description=https://datasheet.octopart.com/RE0805FRE07100KL-Yageo-datasheet-68296309.pdf?src-supplier=Future+Electronics, ComponentLink6URL=https://datasheet.octopart.com/RE0805FRE07100KL-Yageo-datasheet-68296309.pdf?src-supplier=Future+Electronics, ComponentLink7Description=https://datasheet.octopart.com/RE0805FRE07100KL-Yageo-datasheet-137700563.pdf?src-supplier=Future+Electronics, ComponentLink7URL=https://datasheet.octopart.com/RE0805FRE07100KL-Yageo-datasheet-137700563.pdf?src-supplier=Future+Electronics, ComponentLink8Description=https://datasheet.octopart.com/RE0805FRE07100KL-Yageo-datasheet-86798388.pdf, ComponentLink8URL=https://datasheet.octopart.com/RE0805FRE07100KL-Yageo-datasheet-86798388.pdf, Features="Moisture Resistant", Height=0.024inch, Lead Free="Lead Free", Length=0.079inch, Manufacturer Part Number=RE0805FRE07100KL, Number of Terminations=2, Packaging="Tape and Reel", Pricing 1="1=0.1, 10=0.046, 100=0.0185, 1000=0.00832, 2500=0.00722 (USD)", RoHS Compliant=Yes, Stock 1=8480, Supplier 1=Digi-Key, Width=0.049inch
R2 R3 R15 R17 R22: library part AC0805FR-07560RL, "Thick Film Resistors - SMD 1/8W 560ohm 1% AEC-Q200", Case Code (Imperial)=0805, Case Code (Metric)=2012, Manufacturer=Yageo, Max Operating Temperature=155°C, Max Power Dissipation=125mW, Min Operating Temperature=-55°C, Resistor Type="Thick Film", Supplier Part Number 1=YAG3743DKR-ND, Temperature Coefficient=100ppm/°C, Tolerance=1%, Voltage Rating=150V, Case/Package=0805, Category="Resistors Chip Resistor - Surface Mount", ComponentLink1Description=http://www.mouser.com/ds/2/447/yageodocoutput-1111992.pdf?src-supplier=Mouser, ComponentLink1URL=http://www.mouser.com/ds/2/447/yageodocoutput-1111992.pdf?src-supplier=Mouser, Features="Moisture Resistant,Automotive AEC-Q200", Height=0.024inch, Length=0.079inch, Manufacturer Part Number=AC0805FR-07560RL, Number of Terminations=2, Packaging="Tape and Reel", Power Rating=125mW, Pricing 1="1=0.1, 10=0.05, 100=0.0204, 1000=0.00917, 2500=0.00796 (USD)", Resistance=560R, RoHS Compliant=Yes, Series=AC, Stock 1=2339, Supplier 1=Digi-Key, Termination=SMD/SMT, Weight=0.000194oz, Width=0.049inch
R4 R14 R18 R19 R20 R21: library part AC0805FR-071KL, "RES SMD 1K OHM 1% 1/8W 0805", Case Code (Imperial)=0805, Case Code (Metric)=2012, Manufacturer=Yageo, Max Operating Temperature=155°C, Max Power Dissipation=125mW, Min Operating Temperature=-55°C, Resistance=1kR, Resistor Type="Thick Film", Supplier Part Number 1=YAG3703DKR-ND, Temperature Coefficient=100ppm/°C, Tolerance=1%, Voltage Rating=150V, Case/Package=0805, Category="Resistors Chip Resistor - Surface Mount", ComponentLink1Description=https://www.verical.com/server-webapp/html/getDatasheet?partID=732555&src-supplier=Verical, ComponentLink1URL=https://www.verical.com/server-webapp/html/getDatasheet?partID=732555&src-supplier=Verical, Construction=Rectangular, Depth=1.25mm, Features="Moisture Resistant,Automotive AEC-Q200", Height=0.024inch, Lead Free="Lead Free", Length=2mm, Manufacturer Part Number=AC0805FR-071KL, Military Standard=Not, Number of Terminations=2, Packaging="Tape and Reel", Power Rating=125mW, Pricing 1="1=0.1, 10=0.05, 100=0.0204, 1000=0.00917, 2500=0.00796 (USD)", RoHS Compliant=Yes, Series=AC, Stock 1=147840, Supplier 1=Digi-Key, Termination=SMD/SMT, Width=1.25mm
R5 R6 R7 R13 R23 R24 R25: library part RC0805FR-072R2L, "YAGEO         RC0805FR-072R2L             RES, THICK FILM, 2R2, 1%, 0.125W, 0805", Case Code (Imperial)=0805, Case Code (Metric)=2012, Manufacturer=Yageo, Max Operating Temperature=155°C, Max Power Dissipation=125mW, Min Operating Temperature=-55°C, Resistance=2.2R, Resistance Tolerance=1%, Resistor Type="Thick Film", Supplier Part Number 1=311-2.20CRDKR-ND, Temperature Coefficient=200ppm/°C, Voltage Rating=150V, Case/Package=0805, Category="Resistors Chip Resistor - Surface Mount", ComponentLink1Description=http://www.farnell.com/datasheets/444164.pdf?src-supplier=Element14, ComponentLink1URL=http://www.farnell.com/datasheets/444164.pdf?src-supplier=Element14, Construction=Rectangular, Depth=1.25mm, Features="Moisture Resistant", Height=0.5mm, Lead Free="Lead Free", Length=2mm, Manufacturer Part Number=RC0805FR-072R2L, Military Standard=Not, Number of Pins=2, Number of Terminations=2, Packaging="Tape and Reel", Power Rating=125mW, Pricing 1="1=0.1, 10=0.083, 100=0.0339, 1000=0.01521, 2500=0.0132 (USD)", REACH SVHC="No SVHC", RoHS Compliant=Yes, Series=RC, Size Code=0805, Stock 1=3784, Supplier 1=Digi-Key, Technology="THICK FILM", Termination=SMD/SMT, Tolerance=1%, Voltage Rating (DC)=150V, Width=1.25mm
R8 R26 R27 R28: library part CR0805AJ/-000EAS, "Res Anti-Sulfured Jumper Thick Film 0805 0 Ohm 1/8W Molded Paper T/R", Manufacturer=Bourns, Supplier Part Number 1=CR0805AJ/-000EASDKR-ND, Category="Resistors Chip Resistor - Surface Mount", ComponentLink1Description=https://www.bourns.com/docs/product-datasheets/crxxxxa-as.pdf?src-supplier=Digi-Key, ComponentLink1URL=https://www.bourns.com/docs/product-datasheets/crxxxxa-as.pdf?src-supplier=Digi-Key, Manufacturer Part Number=CR0805AJ/-000EAS, Pricing 1="1=0.1, 10=0.067, 100=0.0271, 1000=0.01219, 2500=0.01058 (USD)", Stock 1=2212, Supplier 1=Digi-Key
R9 R16: library part RMCF0805ZT0R00, "STACKPOLE ELECTRONICS - RMCF0805ZT0R00. - RES THKFLM 0805 0 OHM JUMPER 1/8W 200PPM/ C SMD ROHS COMPLIANT: YES", Case Code (Imperial)=0805, Case Code (Metric)=2012, Manufacturer="Stackpole Electronics", Max Operating Temperature=155°C, Max Power Dissipation=125mW, Min Operating Temperature=-55°C, Resistance=0R, Resistor Type="Thick Film", Supplier Part Number 1=RMCF0805ZT0R00DKR-ND, Case/Package=0805, ComponentLink1Description=https://www.verical.com/server-webapp/html/getDatasheet?partID=360417&src-supplier=Verical, ComponentLink1URL=https://www.verical.com/server-webapp/html/getDatasheet?partID=360417&src-supplier=Verical, Construction=Rectangular, Contact Plating=Tin,Matte, Depth=1.25mm, Features="Automotive AEC-Q200", Height=0.026inch, Lead Free="Lead Free", Length=2mm, Manufacturer Part Number=RMCF0805ZT0R00, Military Standard=Not, Mount="Surface Mount", Number of Terminations=2, Packaging="Tape and Reel", Power Rating=125mW, Pricing 1="1=0.1, 10=0.017, 25=0.0128, 50=0.0096, 100=0.0071, 250=0.0054, 500=0.00432, 1000=0.00318 (USD)", Radiation Hardening=No, RoHS Compliant=Yes, Series=RMCF, Size Code=0805, Stock 1=35384, Supplier 1=Digi-Key, Width=0.049inch
R10 R11 R12: library part RC0805FR-101KL, "Res Thick Film 0805 1K Ohm 1% 0.125W(1/8W) ±100ppm/C Pad SMD T/R", Case Code (Imperial)=0805, Case Code (Metric)=2012, Manufacturer=Yageo, Max Operating Temperature=155°C, Min Operating Temperature=-55°C, Power Rating=125mW, Resistance=1kR, Resistance Tolerance=1%, Resistor Type="Thick Film", Supplier Part Number 1=13-RC0805FR-101KLTR-ND, Temperature Coefficient=100ppm/°C, Voltage Rating=150V, Case/Package=0805, Category="Resistors Chip Resistor - Surface Mount", ComponentLink1Description=http://www.farnell.com/datasheets/444164.pdf?src-supplier=Element14, ComponentLink1URL=http://www.farnell.com/datasheets/444164.pdf?src-supplier=Element14, ComponentLink2Description=http://www.mouser.com/ds/2/447/Yageo_08112016_RC0805-968729.pdf?src-supplier=Mouser, ComponentLink2URL=http://www.mouser.com/ds/2/447/Yageo_08112016_RC0805-968729.pdf?src-supplier=Mouser, ComponentLink3Description=https://datasheet.octopart.com/RC0805FR-101KL-Yageo-datasheet-8330313.pdf?src-supplier=Element14, ComponentLink3URL=https://datasheet.octopart.com/RC0805FR-101KL-Yageo-datasheet-8330313.pdf?src-supplier=Element14, ComponentLink4Description=https://datasheet.octopart.com/RC0805FR-101KL-Yageo-datasheet-73766026.pdf, ComponentLink4URL=https://datasheet.octopart.com/RC0805FR-101KL-Yageo-datasheet-73766026.pdf, Construction=Rectangular, Contact Plating=Tin,Matte,Lead, Depth=1.25mm, Height=0.5mm, Length=2mm, Manufacturer Part Number=RC0805FR-101KL, Military Standard=Not, Packaging="Tape and Reel", Pricing 1="10000=0.00473 (USD)", Radiation Hardening=No, REACH SVHC="No SVHC", RoHS Compliant=Yes, Series=RC, Stock 1=0, Supplier 1=Digi-Key, Termination=SMD/SMT, Tolerance=1%, Voltage Rating (DC)=150V, Width=1.25mm
"SCKT FOR U1": library part 4828-3004-CP, "CONN IC DIP SOCKET 28POS TIN", Current Rating=1A, Insulation Resistance=5GR, Manufacturer=3M, Max Operating Temperature=85°C, Min Operating Temperature=-25°C, Package Quantity=5600, Supplier Part Number 1=3M5480-ND, ComponentLink1Description=http://multimedia.3m.com/mws/media/218496O/3mtm-dip-socket-4800-series-ts1099.pdf?src-supplier=Digi-Key, ComponentLink1URL=http://multimedia.3m.com/mws/media/218496O/3mtm-dip-socket-4800-series-ts1099.pdf?src-supplier=Digi-Key, Connector Type=DIP, Contact Material=Bronze, Contact Plating=Tin, Depth=10.16mm, Gender=Female, Housing Material=Glass, Insulation Material=Polyester, Lead Free="Lead Free", Length=35.43mm, Manufacturer Part Number=4828-3004-CP, Mount="Through Hole", Number of Contacts=28, Number of Positions=28, Number of Rows=2, Orientation=Straight, Pitch=2.54mm, Pricing 1="1=0.9, 10=0.762, 25=0.7304, 40=0.715, 80=0.68388, 230=0.62174, 440=0.55959, 945=0.49741, 2400=0.45078 (USD)", REACH SVHC=Unknown, Row Spacing=7.62mm, Series=4800, Stock 1=5327, Supplier 1=Digi-Key, Termination=Solder, Width=10.16mm